# Altium PCB PCM2912_CODEC.PcbDoc
Units mil, origin at the board's own origin, x right, y up, seen from the top; angles counter-clockwise.
Board outline 1574.8 x 1574.8 mil, 2 copper layers (Top Layer, Bottom Layer); 52 components, 40 nets, 167 pads, 67 vias.
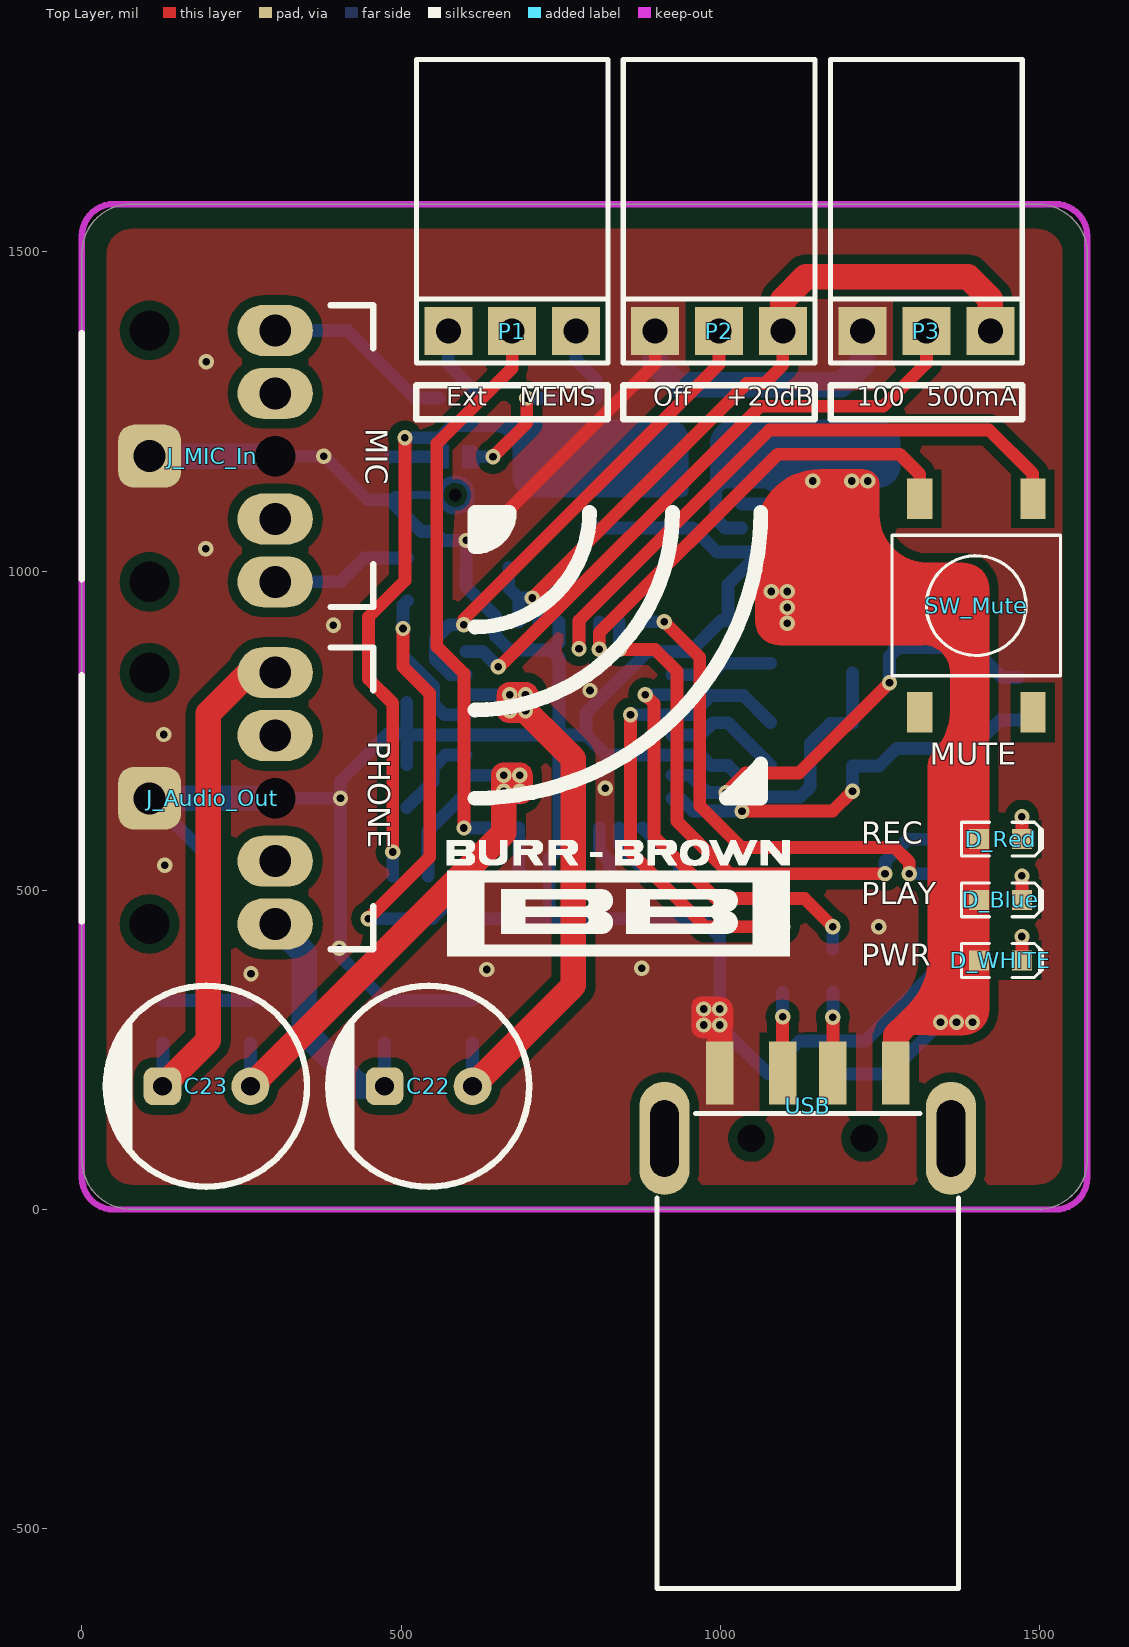
[diagram p0: Top Layer view]
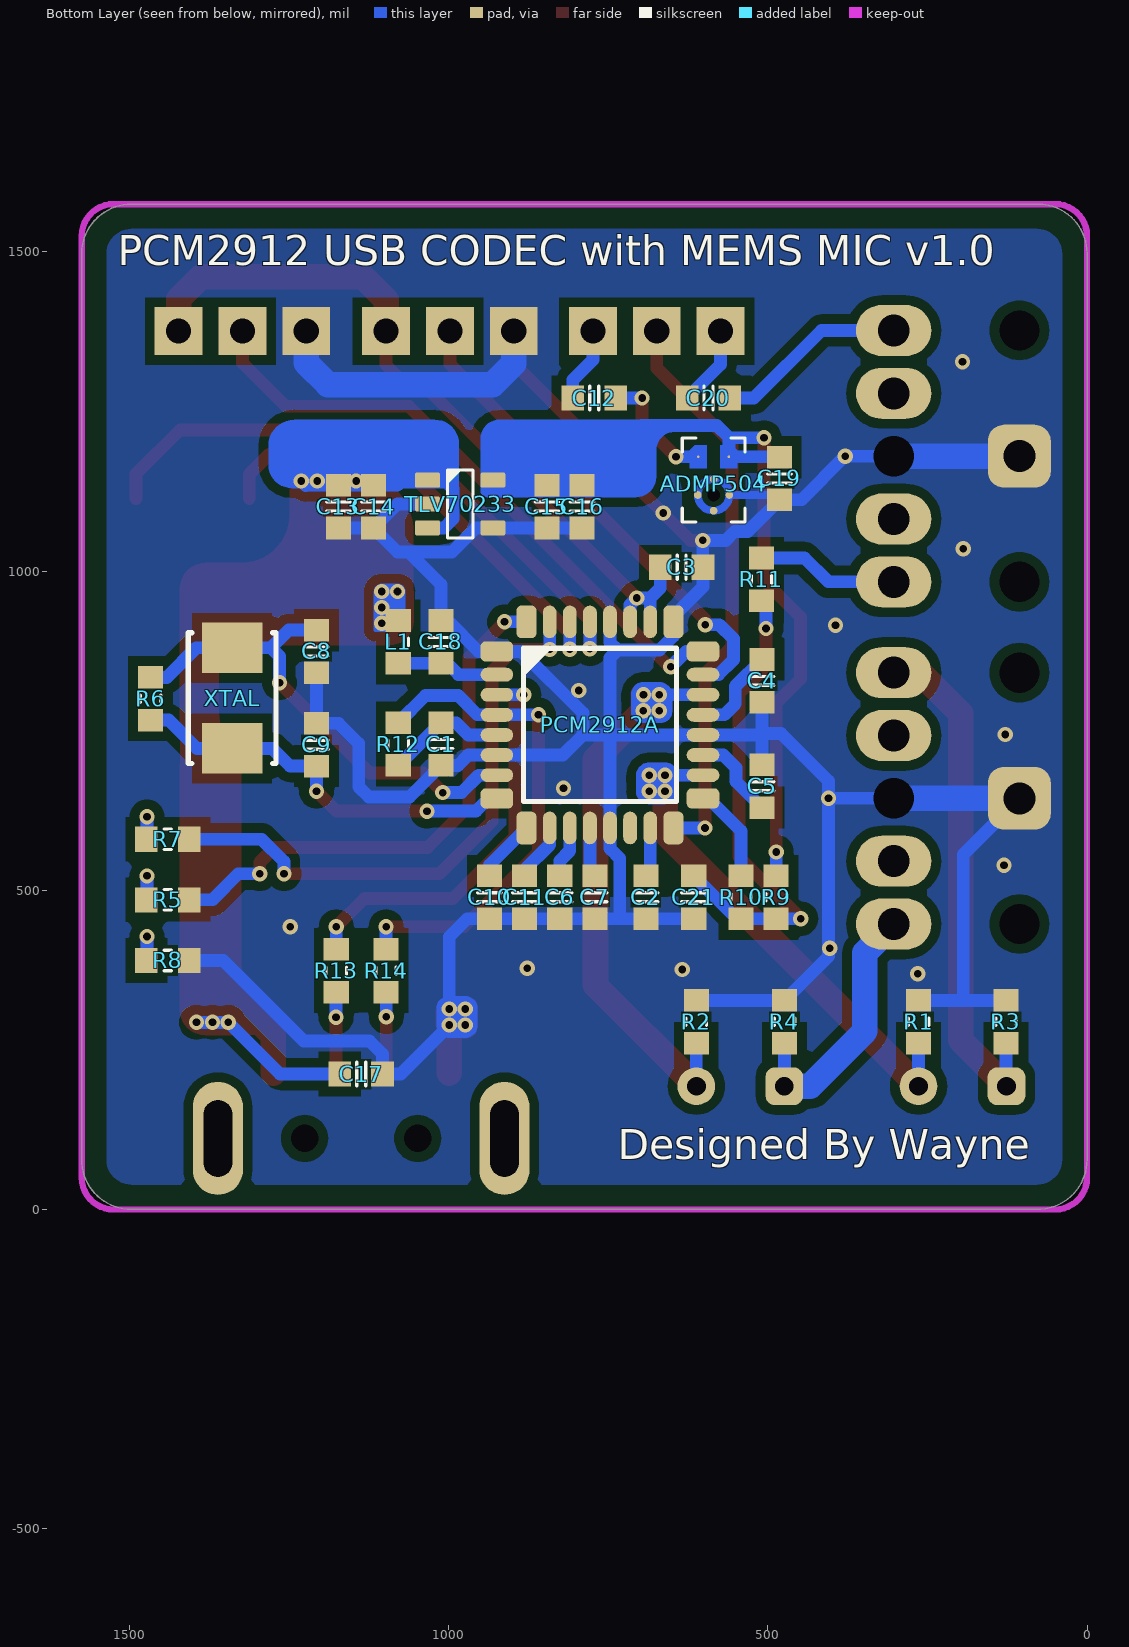
[diagram p1: Bottom Layer view, seen from below]

## Layer stack, top to bottom
Top Layer: signal copper 1.4
Dielectric: dielectric 12.6, FR-4, Dk 4.8
Bottom Layer: signal copper 1.4

## Board outline
78,0 cw(c78,78) 0,78 0,1497.8 cw(c77,1497.8) 77,1574.8 1496.8,1574.8 cw(c1496.8,1496.8) 1574.8,1496.8 1574.8,78 cw(c1496.8,78) 1496.8,0

## Design rules (kind name [scope] priority, off if disabled: settings)
Clearance [All] p1: gap=7
ComponentClearance [All] p1 off: gap=10 collisioncheckmode=3 verticalgap=10 showdistances=FALSE
PolygonConnect [All] p1: connectstyle=Direct reliefconductorwidth=20 reliefentries=4 polygonreliefangle="90 Angle" airgapwidth=10
RoutingVias [All] p1: holewidth=28 width=50 viastyle="Through Hole" minholewidth=12 minwidth=24 maxholewidth=28 maxwidth=50
SilkToSilkClearance [All] p1 off: silktosilkclearance=10
SilkToSolderMaskClearance [IsPad] p1 off: minsilkscreentomaskgap=10 clearancetoexposedcopper=TRUE
SolderMaskExpansion [All] p1: expansion=-1
Width [All] p1: maxlimit=40 minlimit=10 preferedwidth=25
25 further rules are at their usual default settings.

## Components (designator, comment, footprint, x,y, rotation, side; value= is the part's Value field where it differs from the comment)
ADMP504 "ADMP504" ADMP504 585,1179 r270 bottom
C1 "Cap_0603" CAP_0603 1012,729 r90 bottom
C2 "Cap_0603" CAP_0603 691,489 r90 bottom
C3 "Cap_0603" CAP_0603 635,1006 r0 bottom
C4 "Cap_0603" CAP_0603 509,828 r90 bottom
C5 "Cap_0603" CAP_0603 509,663 r270 bottom
C6 "Cap_0603" CAP_0603 826,489 r90 bottom
C7 "Cap_0603" CAP_0603 771,489 r90 bottom
C8 "Cap_0603" CAP_0603 1207,874 r90 bottom
C9 "Cap_0603" CAP_0603 1207,728 r270 bottom
C10 "Cap_0603" CAP_0603 936,489 r90 bottom
C11 "Cap_0603" CAP_0603 881,489 r90 bottom
C12 "Cap_0603" CAP_0603 772,1271 r180 bottom
C13 "Cap_0603" CAP_0603 1172.75,1101 r270 bottom
C14 "Cap_0603" CAP_0603 1117.67,1101 r270 bottom
C15 "Cap_0603" CAP_0603 846.2,1101 r270 bottom
C16 "Cap_0603" CAP_0603 791,1101 r270 bottom
C17 "Cap_0603" CAP_0603 1137,212 r0 bottom
C18 "Cap_0603" CAP_0603 1012,889 r270 bottom
C19 "Cap_0603" CAP_0603 482,1145 r90 bottom
C20 "Cap_0603" CAP_0603 593,1271 r180 bottom
C21 "Cap_0603" CAP_0603 616,489 r90 bottom
C22 "Capacitor" CAP_ELEC_F3.5_D8_H11.5 612,193 r180 top
C23 "Capacitor" CAP_ELEC_F3.5_D8_H11.5 264,193 r180 top
D_Blue "LED_0603_BLUE" LED_0603_BLUE 1439,485 r0 top
D_Red "LED_0603_RED" LED_0603_RED 1439,580 r0 top
D_WHITE "LED_0603_WHITE" LED_0603_WHITE 1439,390 r0 top
J_Audio_Out "Generic 3.5 PhoneJack 5 Pin through-hole" "3.5 PhoneJack 5 Pin" 106,644 r180 top
J_MIC_In "Generic 3.5 PhoneJack 5 Pin through-hole" "3.5 PhoneJack 5 Pin" 106,1180 r180 top
L1 "Ind_0603" IND_0603 1079,889 r270 bottom
P1 "HDR1X3_90_2.54" HDR1X3_90_2.54 574,1376 r0 top
P2 "HDR1X3_90_2.54" HDR1X3_90_2.54 898,1376 r0 top
P3 "HDR1X3_90_2.54" HDR1X3_90_2.54 1223,1376 r0 top
PCM2912A "PCM2912A" TI-S-PQFP-N32 763,759 r180 bottom
R1 "Res_0603" RES_0603 264,294 r90 bottom
R2 "Res_0603" RES_0603 612,294 r90 bottom
R3 "Res_0603" RES_0603 127,294 r90 bottom
R4 "Res_0603" RES_0603 474,294 r90 bottom
R5 "Res_0603" RES_0603 1440,485 r180 bottom
R6 "Res_0603" RES_0603 1467,800 r270 bottom
R7 "Res_0603" RES_0603 1440,580 r180 bottom
R8 "Res_0603" RES_0603 1440,390 r180 bottom
R9 "Res_0603" RES_0603 487,489 r270 bottom
R10 "Res_0603" RES_0603 542,489 r270 bottom
R11 "Res_0603" RES_0603 510,987 r270 bottom
R12 "Res_0603" RES_0603 1079,729 r90 bottom
R13 "Res_0603" RES_0603 1176,374 r90 bottom
R14 "Res_0603" RES_0603 1098,374 r90 bottom
SW_Mute "TACT Swtich SMT 6*6" "TACT Switch SMT 6*6" 1401,946 r270 top
TLV70233 "TLV70233" SOT23-5 982,1105 r180 bottom
USB "USB" USB 1137,5 r270 top
XTAL "XTAL_5032" XTAL_5032 1339,801 r90 bottom

## Footprints (in the part's own frame and the unit in brackets; to place one, negate y for a bottom-side part, rotate by r counter-clockwise, add the part's x,y. Pads: shape width x height; smd on the part's side, far side on the other; paste and mask are expansions set on the pad)
"3.5 PhoneJack 5 Pin" [mm] "Generic 3.5 PhoneJack 5 Pin  through-hole"
  round 1 hole 1.6: 0(0,5) 0(0,-5) Sleeve(-5,0)
  oval 3x2.032 hole 1.27: Ring_NC(-5,2.5) Ring_NO(-5,5) Tip_NC(-5,-2.5) Tip_NO(-5,-5)
  rrect50% 2.5x2.5 hole 1.27: Sleeve(0,0)
  silkscreen extent -8.9,-6 2.7,6, body extent -8.48,-6 6.52,6, height 10
ADMP504 [mm] "ADMP504 MEMS MICROPHONE"
  round 0.4 hole 0.5 unplated: 0(1.52,0)
  round 0.1 smd mask+0: 1(0,-0.61) 3(0,0.61)
  round 0.305 smd mask+0: 2(0.892,0) 2(1.52,-0.628) 2(1.52,0.628) 2(2.148,0)
  Top Layer circle w0.305: c1.52,0 r0.628
  Top Layer region: -0.45,-0.27 -0.45,-0.75 -0.25,-0.95 0.45,-0.95 0.45,-0.27
  Top Layer region: -0.25,0.95 -0.45,0.75 -0.45,0.27 0.45,0.27 0.45,0.95
  silkscreen extent -0.75,-1.25 2.6,1.25, body extent -0.82,-1.29 2.6,1.29, height 0.98
CAP_0603 [mm] "Chip Capacitor, Body 1.6x0.8mm, 0603, IPC Medium Density"
  rect 0.9x1 smd: 1(-0.85,0) 2(0.85,0)
  Top Layer pour cut-out: -0.4,0.6 0.4,0.6 0.4,-0.6 -0.4,-0.6
  silkscreen extent -0.18,-0.48 0.18,0.48, body extent -0.85,-0.45 0.85,0.45, height 0.89
CAP_ELEC_F3.5_D8_H11.5 [mm] "CAP_ELEC_F3.5_D8_H11.5"
  round 1.5 hole 0.75: 1(0,0)
  rrect50% 1.5x1.5 hole 0.75: 2(3.5,0)
  silkscreen extent -2.25,-4 5.75,4, body extent -2.27,-4.03 5.78,4.03, height 12.03
HDR1X3_90_2.54 [mm] "Connector; Header; 3 Position"
  rect 1.905x1.905 hole 1: 1(0,0) 2(2.54,0) 3(5.08,0)
  silkscreen extent -1.27,-1.27 6.35,10.79, body extent -1.17,-0.38 6.25,10.76, height 2.52
IND_0603 [mm] "Chip bead, Body 1.6x0.8mm, 0603, IPC Medium Density"
  rect 0.9x1 smd: 1(-0.85,0) 2(0.85,0)
  Top Layer pour cut-out: -0.4,0.6 0.4,0.6 0.4,-0.6 -0.4,-0.6
  silkscreen extent -0.15,-0.41 0.15,0.41, body extent -0.8,-0.4 0.8,0.4, height 0.79
LED_0603_BLUE [mm] "Chip Capacitor, 2-Leads, Body 1.6x0.8mm, IPC Medium Density"
  rect 0.8x0.8 smd: 1(-0.85,0) 2(0.85,0)
  Top Layer pour cut-out: -0.5,0.5 0.5,0.5 0.5,-0.5 -0.5,-0.5
  silkscreen extent -1.55,-0.67 1.68,0.67, body extent -0.8,-0.4 0.8,0.4, height 0.75
LED_0603_RED [mm] "Chip Capacitor, 2-Leads, Body 1.6x0.8mm, IPC Medium Density"
  rect 0.8x0.8 smd: 1(-0.85,0) 2(0.85,0)
  Top Layer pour cut-out: -0.5,0.5 0.5,0.5 0.5,-0.5 -0.5,-0.5
  silkscreen extent -1.55,-0.67 1.68,0.67, body extent -0.8,-0.4 0.8,0.4, height 0.75
LED_0603_WHITE [mm] "Chip Capacitor, 2-Leads, Body 1.6x0.8mm, IPC Medium Density"
  rect 0.8x0.8 smd: 1(-0.85,0) 2(0.85,0)
  Top Layer pour cut-out: -0.5,0.5 0.5,0.5 0.5,-0.5 -0.5,-0.5
  silkscreen extent -1.55,-0.67 1.68,0.67, body extent -0.8,-0.4 0.8,0.4, height 0.75
RES_0603 [mm]
  rect 0.9x1 smd: 1(-0.85,0) 2(0.85,0)
  Top Layer pour cut-out: -0.4,0.6 0.4,0.6 0.4,-0.6 -0.4,-0.6
  silkscreen extent -0.15,-0.41 0.15,0.41, body extent -0.87,-0.47 0.88,0.48, height 0.54
SOT23-5 [mm]
  round 0.5 on Mech14: 0(0,0)
  rrect25% 1x0.6 smd: 1(-1.3,0.95) 2(-1.3,0) 3(-1.3,-0.95) 4(1.3,-0.95) 5(1.3,0.95)
  silkscreen extent -0.51,-1.35 0.51,1.35, body extent -1.4,-1.45 1.4,1.45, height 1.44
"TACT Switch SMT 6*6" [mm] "TACT Switch SMT 6*6"
  round 0.508 on Mech14: 0(0,0)
  rect 1.6x1 smd: 1(-4.25,2.25) 1(4.25,2.25) 2(-4.25,-2.25) 2(4.25,-2.25)
  silkscreen extent -2.79,-3.35 2.79,3.35, body extent -5,-3 5,3, height 5.07
TI-S-PQFP-N32 [mm] "TQFP, 32-Leads, Body 7.00x7.00mm, Pitch 0.80mm, IPC High Density"
  rrect50% 1.3x0.8 smd: 1(-4.1,2.925) 8(-4.1,-2.925) 17(4.1,-2.925) 24(4.1,2.925)
  oval 1.3x0.55 smd: 2(-4.1,2) 3(-4.1,1.2) 4(-4.1,0.4) 5(-4.1,-0.4) 6(-4.1,-1.2) 7(-4.1,-2) 18(4.1,-2) 19(4.1,-1.2) 20(4.1,-0.4) 21(4.1,0.4) 22(4.1,1.2) 23(4.1,2)
  rrect50% 0.8x1.3 smd: 9(-2.925,-4.1) 16(2.925,-4.1) 25(2.925,4.1) 32(-2.925,4.1)
  oval 0.55x1.3 smd: 10(-2,-4.1) 11(-1.2,-4.1) 12(-0.4,-4.1) 13(0.4,-4.1) 14(1.2,-4.1) 15(2,-4.1) 26(2,4.1) 27(1.2,4.1) 28(0.4,4.1) 29(-0.4,4.1) 30(-1.2,4.1) 31(-2,4.1)
  silkscreen extent -3.05,-3.05 3.05,3.05, body extent -4.51,-4.5 4.49,4.5, height 1.6
USB [mm] "Connector; USB1.1, Type A, SM; 4 Position; Right Angle"
  round 0.8 hole 1.1: 0(-2.7,2.25) 0(-2.7,-2.25)
  rect 2.5x1.1 smd: 1(-5.3,3.5) 2(-5.3,1) 3(-5.3,-1) 4(-5.3,-3.5)
  oval 4.5x2 hole 1.143 slot 3.048 at 0 deg: 5(-2.7,-5.7) 6(-2.7,5.7)
  silkscreen extent -3.7,-6 15.2,6, body extent -5.3,-6.3 15,6.31, height 3.15
XTAL_5032 [mm] "Molded Capacitor, 2-Leads, Body 5.0x3.2mm, IPC Medium Density"
  rect 2x2.4 smd: 1(-2,0) 2(2,0)
  silkscreen extent -2.6,-1.75 2.6,1.75, body extent -2.5,-1.6 2.5,1.6, height 1

## Part data
ADMP504: "ADMP504 Analog Output MEMS Microphone"
C1 C2 C3 C4 C5 C6 C7 C8 C9 C10 C11 C12 C13 C14 C15 C16 C17 C18 C19 C20 C21: "Capacitor"
C22 C23: library part Cap_ELEC_8*11.5*3.5, "Cap_ELEC_8*11.5*3.5"
D_Blue D_Red D_WHITE: "LED"
L1: "Inductor"
P1 P2 P3: "Header"
PCM2912A: "PCM2912A USB CODEC"
R1 R2 R3 R4 R5 R6 R7 R8 R9 R10 R11 R12 R13 R14: "Resistor"
TLV70233: "300mA LDO SOT-23"
XTAL: "Crystal Oscillator"

## Via types
v1: diameter 24, hole 12, Top Layer to Bottom Layer, 67 vias

## Nets (pads, with @x,y where several pads share a name; then routed paths per layer and width w, separated by ;. In a path a pad name is that pad's centre, name@x,y a point inside that pad or via, vN(x,y) a via of type N, cw(c..) or ccw(c..) an arc to the next point about the centre after c; other vN are vias at no path point)
3V3: ADMP504.3 C15.1 C16.1 C19.2 R9.1 TLV70233.5 | length 1309.8
  Top Layer w20: v1(487,560) 487,793 449,831 449,928 506,985 v1(506,1209)
  Bottom Layer w20: C19.2 482.54,1179 ADMP504.3 560.98,1208.98 ; R9.1 v1(487,560) ; v1(506,1209) 560.98,1208.98 ; TLV70233.5 895.4,1142.4 887.46,1134.46 C15.1 C16.1 697.46,1228 580,1228 560.98,1208.98
5V: C13.1 C14.1 C17.2 D_Blue.1 D_Red.1 D_WHITE.1 L1.1 TLV70233.1 TLV70233.3 USB.1 | length 2210.7
  Top Layer w20: 1345,390 D_WHITE.1 D_Blue.1 D_Red.1
  Top Layer w40: v1@1105,971.25 1224,971.25 ; v1@1224,1134 1224,971.25 ; USB.1 1274.8,272.8 1295,293 v1(1345,293) 1345,390 1345,618 1401,674 1401,971.25 1224,971.25
  Bottom Layer w20: TLV70233.3 1007.4,1067.6 993,1082 993,1129 1006.4,1142.4 TLV70233.1 1072.6,1142.4 1080.54,1134.46 C14.1 C13.1 1223.54,1134.46 v1@1224,1134 ; L1.1 1080,923.46 v1(1080,968) v1(1105,968) ; C17.2 1264,212 v1(1345,293) v1(1370,293) v1(1395,293)
  other v1: 1105,918 1105,943 1145,1141 1206,1141 1231,1141
AGND: ADMP504.2 C1.1 C2.1 C3.1 C4.1 C5.1 C6.1 C7.1 C8.1 C9.1 C10.1 C11.1 C13.2 C14.2 C15.2 C16.2 C17.1 C18.1 C19.1 C21.1 J_Audio_Out.Sleeve J_MIC_In.Sleeve P2.1 P3.1 PCM2912A.1 PCM2912A.6 PCM2912A.13 PCM2912A.20 PCM2912A.25 PCM2912A.28 R1.2 R2.2 R3.2 R4.2 R8.2 TLV70233.2 TLV70233.4 USB.4 | length 6920.1
  Top Layer w20: v1(602,1048) 621,1048 898,1325 P2.1
  Top Layer w40: USB.4 v1(999.2,289)
  Bottom Layer w12.01: C19.1 489.62,1119.16 ADMP504.2@560.28,1119.16
  Bottom Layer w20: J_Audio_Out.Sleeve@106,644 194,556 194,327.46 R3.2 R1.2 ; J_Audio_Out.Sleeve@302.85,644 v1(405,644) ; J_MIC_In.Sleeve@302.85,1180 v1(379,1180) 447.46,1111.54 C19.1 531.54,1062 552,1062 566,1048 v1(602,1048) 602,1006.46 C3.1 601.54,975.46 647.84,929.16 PCM2912A.25 647.84,898.16 669.75,876.25 735.25,876.25 ; C5.1 509,743.25 PCM2912A.20 747.25,743.25 ; C4.1 509,745.5 479.5,745.5 405,671 v1(405,644) ; R2.2 R4.2 405,396.46 v1(405,644) ; C21.1 C2.1 732,455.54 ; PCM2912A.28 747.25,888.25 735.25,876.25 ; C16.2 C15.2 846.27,1067.6 TLV70233.4 957.4,1067.6 995,1030 1063,1030 ; v1(974,289) v1(999.2,289) ; TLV70233.2 1080.21,1105 C14.2 ; C13.2 C14.2 ; C8.1 C9.1 1172.46,761.46 1141,730 1141,662 1125,646 1061.54,646 C1.1 985.46,695.54 969.24,711.76 PCM2912A.6 821.24,711.76 789.75,743.25 ; R8.2 1353,390 1227,264 1124,264 1103.54,243.54 C17.1 1075,212 999.2,287.8 v1(999.2,289) ; 732,455.54 732,550 747.25,565.25 PCM2912A.13 747.25,743.25 ; 732,455.54 C7.1 C6.1 C11.1 C10.1 970.46,455.54 999.2,426.8 v1(999.2,289) ; 735.25,876.25 747.25,864.25 747.25,743.25 ; 747.25,743.25 789.75,743.25 ; 789.75,743.25 789.75,777.75 886.16,874.16 PCM2912A.1 953.16,874.16 1001.46,922.46 C18.1 1012,979 1063,1030 ; 1063,1030 1080.14,1030 C14.2
  Bottom Layer w40: J_Audio_Out.Sleeve@106,644 J_Audio_Out.Sleeve@302.85,644 ; J_MIC_In.Sleeve@106,1180 J_MIC_In.Sleeve@302.85,1180 ; P2.1 898,1325 931,1292 1189,1292 1223,1326 P3.1
  other v1: 974,314 999,314 265,369 634,376 877,378 403,409 1248,443 130,539 820,660 128,744 796,813 394,915 194,1035 664,1091 195,1328
BIAS: J_MIC_In.Ring_NO R11.1 | length 222.6
  Bottom Layer w20: J_MIC_In.Ring_NO 405.15,983.15 442.46,1020.46 R11.1
D+: PCM2912A.4 R12.2 R14.2 | length 787.5
  Top Layer w20: v1(859.25,774.75) 859.25,559.75 976,443 v1(1098,443)
  Bottom Layer w20: v1(859.25,774.75) PCM2912A.4 954.75,774.75 985,805 1036.46,805 R12.2 ; R14.2 v1(1098,443)
D-: PCM2912A.3 R13.2 | length 644.1
  Top Layer w20: v1(882.24,806.24) 896,792.49 896,584 993,487 1132,487 v1(1176,443)
  Bottom Layer w20: v1(882.24,806.24) PCM2912A.3 ; R13.2 v1(1176,443)
FL: C10.2 PCM2912A.9 | length 99.1
  Bottom Layer w20: PCM2912A.9 936,539.74 C10.2
FR: C11.2 PCM2912A.10 | length 91.4
  Bottom Layer w20: PCM2912A.10 841.74,571.26 881,532 C11.2
MAMP: P2.2 PCM2912A.23 | length 769
  Top Layer w20: v1(598,916) 598,924 998,1324 P2.2
  Bottom Layer w20: v1(598,916) 576,916 554,894 554,860.97 577.23,837.74 PCM2912A.23
MBIAS: PCM2912A.17 R10.1 | length 151.2
  Bottom Layer w20: R10.1 542,593 592.84,643.84 PCM2912A.17
MIC_EXTERNAL: C20.2 J_MIC_In.Tip_NO | length 300.5
  Bottom Layer w20: J_MIC_In.Tip_NO 416.15,1376.85 522,1271 C20.2
MIC_MEMS: ADMP504.1 C12.2 | length 190.5
  Top Layer w20: v1(644,1179) 697,1232 v1(697,1271)
  Bottom Layer w20: ADMP504.1 v1(644,1179) ; v1(697,1271) C12.2
MMUTE: PCM2912A.30 SW_Mute.2 | length 737.5
  Top Layer w20: v1(810.24,877.76) 810.24,903.24 1090,1183 1281,1183 1312.42,1151.58 SW_Mute.2@1312.42,1113.32
  Bottom Layer w20: v1(810.24,877.76) PCM2912A.30
NetC12_1: C12.1 P1.3 | length 118
  Bottom Layer w20: P1.3 774,1331 805.46,1299.54 C12.1
NetC20_1: C20.1 P1.1 | length 126.7
  Bottom Layer w20: P1.1 574,1323.46 C20.1
NetC21_2: C21.2 R9.2 R10.2 R11.2 | length 753.5
  Top Layer w20: v1(448.46,455.54) 545,552.07 545,808 503,850 v1(503,910)
  Bottom Layer w20: v1(448.46,455.54) R9.2 R10.2 549.07,455.54 C21.2 ; v1(503,910) 503,946.54 R11.2
NetD_Blue_2: D_Blue.2 R5.1 | length 75.3
  Top Layer w20: D_Blue.2 v1(1472.46,522.46)
  Bottom Layer w20: v1(1472.46,522.46) 1472.46,486 R5.1
NetD_Red_2: D_Red.2 R7.1 | length 70.4
  Top Layer w20: D_Red.2 v1(1472.46,615)
  Bottom Layer w20: v1(1472.46,615) 1472.46,581 R7.1
NetD_WHITE_2: D_WHITE.2 R8.1 | length 75.3
  Top Layer w20: D_WHITE.2 v1(1472.46,427.46)
  Bottom Layer w20: v1(1472.46,427.46) 1472.46,391 R8.1
NetR13_1: R13.1 USB.2 | length 127
  Top Layer w20: USB.2 v1(1176.37,301)
  Bottom Layer w20: R13.1 1176.37,340.17 v1(1176.37,301)
NetR14_1: R14.1 USB.3 | length 127
  Top Layer w20: USB.3 v1(1097.63,302)
  Bottom Layer w20: v1(1097.63,302) 1097.63,340.17 R14.1
P\L\A\Y\: PCM2912A.32 R5.2 | length 855.7
  Top Layer w20: v1(912.42,920.42) 968,864.83 968,632 1033,567 1273,567 1296,544 v1(1296,526)
  Bottom Layer w20: PCM2912A.32 v1(912.42,920.42) ; v1(1296,526) 1329,526 1370,485 R5.2
PHONEL: C23.2 J_Audio_Out.Tip_NO R3.1 | length 812.9
  Top Layer w40: C23.2 198,264.8 198,777 261.85,840.85 J_Audio_Out.Tip_NO
  Bottom Layer w20: C23.2 127,193.8 R3.1
PHONER: C22.2 J_Audio_Out.Ring_NO R4.1 | length 416
  Bottom Layer w20: C22.2@474,193.2 R4.1
  Bottom Layer w40: J_Audio_Out.Ring_NO 348,402 348,279 434,193 C22.2
POWER: P3.2 PCM2912A.24 | length 972.3
  Top Layer w20: v1@657,853 1062,1258 1255,1258 1323,1326 P3.2
  Bottom Layer w20: PCM2912A.24 627.84,874.16 v1(652,850)
R\E\C\: PCM2912A.31 R7.2 | length 924.6
  Top Layer w20: v1(841.74,877.26) 897.74,877.26 932,843 932,608 1014,526 v1(1258,526)
  Bottom Layer w20: v1(841.74,877.26) PCM2912A.31 ; v1(1258,526) 1258,545 1293,580 R7.2
SSPND: PCM2912A.29 SW_Mute.1 | length 988.5
  Top Layer w20: v1(778.75,878.25) 778.75,922.75 1077,1221 1421,1221 1489.58,1152.42 SW_Mute.1@1489.58,1113.32
  Bottom Layer w20: v1(778.75,878.25) PCM2912A.29
VBUS: C18.2 L1.2 PCM2912A.2 | length 162
  Bottom Layer w20: PCM2912A.2 984.74,837.74 1002.54,855.54 C18.2 L1.2
VCCA: C2.2 PCM2912A.15 | length 77.9
  Bottom Layer w20: PCM2912A.15 684.26,529.2 C2.2
VCCL: C5.2 PCM2912A.19 | length 139.2
  Bottom Layer w20: C5.2 550,670.54 550,692 569.76,711.76 PCM2912A.19
VCCP: C3.2 P2.3 P3.3 PCM2912A.26 PCM2912A.27 | length 1205.2
  Top Layer w20: v1(705.26,957.74) 1041.52,1294 1069,1294 1098,1323 P2.3
  Top Layer w40: P2.3 1098,1425 1134,1461 1388,1461 1423,1426 P3.3
  Bottom Layer w20: C3.2 668.46,973.54 684.26,957.74 ; PCM2912A.26 684.26,957.74 ; PCM2912A.27 715.76,947.24 v1(705.26,957.74) 684.26,957.74
VCCR: C4.2 PCM2912A.21 | length 144.6
  Bottom Layer w20: C4.2 551,819.46 551,792 568.25,774.75 PCM2912A.21
VCOM1: C6.2 PCM2912A.11 | length 81.6
  Bottom Layer w20: PCM2912A.11 810.24,561.76 826,546 C6.2
VCOM2: C7.2 PCM2912A.12 | length 78.3
  Bottom Layer w20: C7.2 778.75,530.21 PCM2912A.12
VDD: C1.2 PCM2912A.5 R12.1 | length 190.3
  Bottom Layer w20: PCM2912A.5 969.25,743.25 988.46,762.46 C1.2 1078.93,695.54 R12.1
VIN: P1.2 PCM2912A.16 | length 894.3
  Top Layer w20: v1(598.42,597.58) 598.42,839.58 556,882 556,1200 674,1318 P1.2
  Bottom Layer w20: v1(598.42,597.58) PCM2912A.16
VOUTL: C23.1 PCM2912A.18 R1.1 | length 853.9
  Top Layer w40: C23.1 661,590 v1(661,680.26)
  Bottom Layer w20: C23.1 R1.1 ; PCM2912A.18 v1(661,680.26) 661,680 v1(686,680) v1(686,655) v1(661,655)
VOUTR: C22.1 PCM2912A.22 R2.1 | length 931.2
  Top Layer w40: C22.1 770,351 770,706 v1@670,806
  Bottom Layer w20: PCM2912A.22 v1(670,806.24) ; C22.1 R2.1 ; v1(670,781) v1(670,806.24) ; v1(695,781) 695,806 v1(694.76,806.24) v1(670,806.24)
XTI: C9.2 PCM2912A.8 R6.2 XTAL.1 | length 633
  Top Layer w20: v1(1034,624) 1176,624 v1(1207,655)
  Bottom Layer w20: PCM2912A.8 937.16,643.84 957,624 v1(1034,624) ; v1(1207,655) C9.2 1248.54,694.54 1276.26,722.26 XTAL.1 1394.26,722.26 1438.54,766.54 R6.2
XTO: C8.2 PCM2912A.7 R6.1 XTAL.2 | length 774
  Top Layer w20: v1(1009,653) 1039.5,683.5 1123.5,683.5 v1(1265,825)
  Bottom Layer w20: PCM2912A.7 952.74,680.26 980,653 v1(1009,653) ; C8.2 1250.54,907.46 1278.26,879.74 ; v1(1265,825) 1265,866.48 1278.26,879.74 ; R6.1 1441.54,833.46 1395.26,879.74 XTAL.2 1278.26,879.74
pads on no net: ADMP504.0 J_Audio_Out.0 J_Audio_Out.Ring_NC J_Audio_Out.Tip_NC J_MIC_In.0 J_MIC_In.Ring_NC J_MIC_In.Tip_NC PCM2912A.14 SW_Mute.0 TLV70233.0 USB.0 USB.5 USB.6

## Polygon pours and split planes (outlines as drawn)
AGND on Top Layer "Bottom Layer-No Net" (solid, remove dead copper, pour order 2): 78,1535.8 ccw(c78,1496.8) 39,1496.8 39,78 ccw(c78,78) 78,39 1496.8,39 ccw(c1496.8,78) 1535.8,78 1535.8,1496.8 ccw(c1496.8,1496.8) 1496.8,1535.8 74,1535.8
AGND on Bottom Layer "Bottom Layer-No Net" (solid, remove dead copper, pour order 4): 78,39 1496.8,39 ccw(c1496.8,78) 1535.8,78 1535.8,1496.8 ccw(c1496.8,1496.8) 1496.8,1535.8 78,1535.8 ccw(c78,1496.8) 39,1496.8 39,78 ccw(c78,78) 78,39

## Keep-outs
Keep-Out Layer:
  lines w10: 0,50 ccw(c50,50) 50,0 1524.8,0 ccw(c1524.8,50) 1574.8,50 1574.8,1524.8 ccw(c1524.8,1524.8) 1524.8,1574.8 50,1574.8 ccw(c50,1524.8) 0,1524.8 0,1496.8 0,78 0,50

## Other copper
Top Layer:
  region net AGND: 973,268 cw(c973,286) 955,286 955,318 cw(c970,318) 970,333 999,333 cw(c999,312) 1020,312 1020,288 cw(c1000,288) 1000,268
  region net VOUTL: 661,700 ccw(c661,680) 641,680 641,655.13 ccw(c661,655.13) 661,635.13 688.13,635.13 ccw(c688.13,653) 706,653 706,680 ccw(c686,680) 686,700
  region net VOUTR: 670,826 ccw(c670,806) 650,806 650,782 ccw(c670,782) 670,762 695,762 cw(c695,761) 696,761 696,762 697,762 ccw(c697,780) 715,780 715,806 ccw(c695,806) 695,826
  region net 5V: 1225,1159.22 1155.22,1159.22 ccw(c1155.22,1059.22) 1055.22,1059.22 1055.22,970.39 ccw(c1062.62,970.39) 1062.62,963 1227,963
  region net 5V: 1277,303 1295.71,321.71 ccw(c1225,392.42) 1325,392.42 1325,400 1382.59,400 ccw(c1382.59,403.41) 1385,401 1385,284 1279.41,284 cw(c1279.41,287.41) 1277,285
  region net 5V: 1334.46,718.54 ccw(c1272.81,780.18) 1360,780.18 1360,797 1382.59,797 ccw(c1382.59,800.41) 1385,798 ccw(c1389.83,793.17) 1383,793.17 1383,704 1343.66,704 ccw(c1343.66,690.34) 1334,700
  region net 5V: 1360,708 1360,842 ccw(c1318,842) 1318,884 1092,884 cw(c1092,921) 1055,921 1055,967 cw(c1081,967) 1081,993 1099,993 ccw(c1099,1093) 1199,1093 1199,1133 cw(c1225,1133) 1225,1159 cw(c1225,1135) 1249,1135 1249,1089 ccw(c1325,1089) 1325,1013 1381,1013 cw(c1381,973) 1421,973 1421,739 cw(c1390,739) 1390,708
  region net 5V: 1325,273 1382,273 ccw(c1382,312) 1421,312 1421,696 ccw(c1389,696) 1389,728 1358,728 ccw(c1358,695) 1325,695
Bottom Layer:
  pour cut-out: 634.21,1208.53 535.79,1208.53 535.79,1076.64 634.21,1076.64
  region net AGND: 974,269 cw(c974,288) 955,288 955,315 cw(c974,315) 974,334 1000,334 cw(c1000,315) 1019,315 1019,289 cw(c999,289) 999,269
  region net VOUTL: 661,700 ccw(c661,680) 641,680 641,655 ccw(c661,655) 661,635 687,635 ccw(c687,654) 706,654 706,680 ccw(c686,680) 686,700
  region net VOUTR: 670,826 ccw(c670,806) 650,806 650,780 ccw(c668,780) 668,762 697,762 ccw(c697,779) 714,779 714,807 ccw(c695,807) 695,826
  region net 5V: 1068,905 1115,905 ccw(c1115,907) 1117,907 1117,968 ccw(c1105,968) 1105,980 1079,980 ccw(c1079,969) 1068,969
  region net 5V: 1022,1237 ccw(c1022,1199) 984,1199 984,1131 ccw(c985,1131) 985,1130 1246,1130 ccw(c1246,1166) 1282,1166 1282,1197 ccw(c1242,1197) 1242,1237
  region net 3V3: 674.79,1189.5 ccw(c646.29,1189.5) 646.29,1218 644,1218 644,1228 ccw(c645,1228) 645,1227 689,1227 689,1189
  region net 3V3: 920,1237 cw(c920,1207) 950,1207 950,1126 cw(c940,1126) 940,1116 706,1116 cw(c706,1147) 675,1147 675,1232 cw(c680,1232) 680,1237

## Silkscreen, mask and mechanical layers (free items; w line width, h text height)
Top Overlay:
  drawing of 3589 lines, arcs and shapes, not listed
  text "Ext" at 570.61,1248.48 h50
  text "MEMS" at 685.61,1248.48 h50
  text "Off" at 894.61,1248.48 h50
  text "+20dB" at 1009.61,1248.48 h50
  text "100" at 1213.61,1248.48 h50
  text "500mA" at 1323.61,1248.48 h50
  text "MIC" at 433,1224 h60 r270
  text "PHONE" at 437,734 h60 r270
  text "MUTE" at 1328,685 h60
  text "REC" at 1221,561 h60
  text "PLAY" at 1221,466 h60
  text "PWR" at 1221,370 h60
Bottom Overlay:
  text "PCM2912 USB CODEC with MEMS MIC v1.0" at 1518,1463 h80
  text "Designed By Wayne" at 735,63 h80
Mechanical 1:
  lines w10: 0,39 0,0 39,0 ; 0,1535.8 0,1574.8 39,1574.8 ; 1535.8,0 1574.8,0 1574.8,39 ; 1535.8,1574.8 1574.8,1574.8 1574.8,1535.8